# Altium PCB PtHeadMB.PcbDoc
Units mm, origin at the board's own origin, x right, y up, seen from the top; angles counter-clockwise.
Board outline 41.01 x 24 mm, 2 copper layers (Top Layer, Bottom Layer), stack 1.48 mm thick; 96 components, 65 nets, 288 pads, 455 vias.
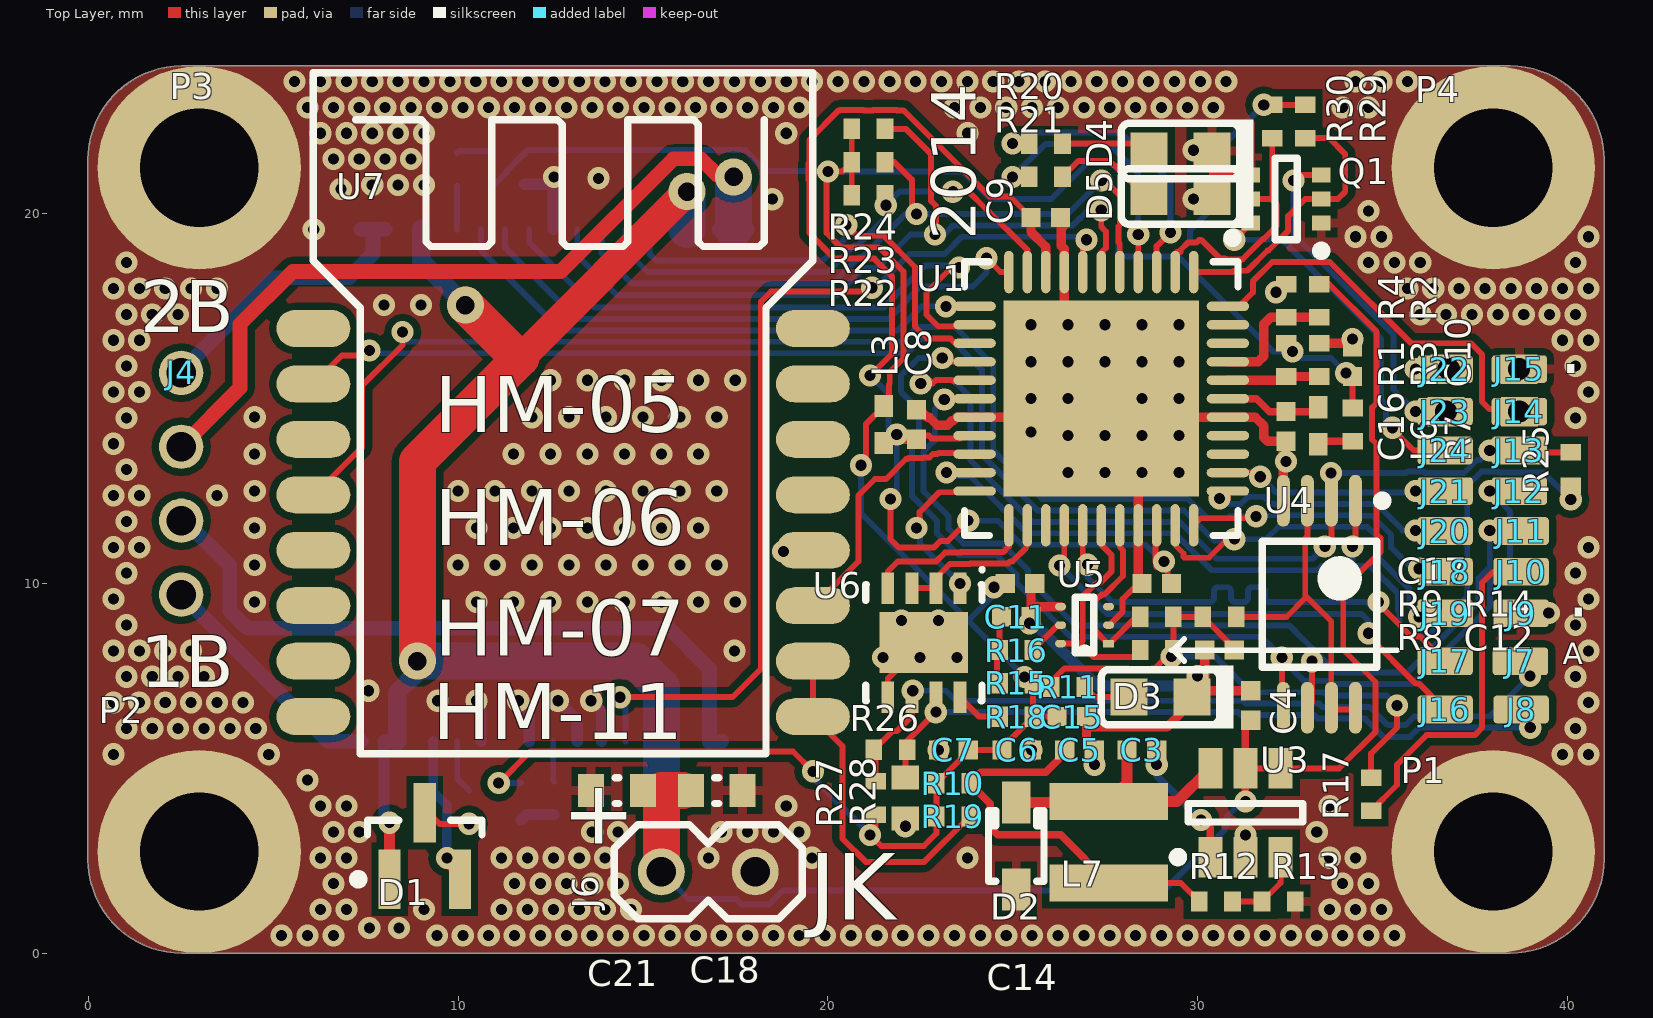
[diagram p0: Top Layer view]
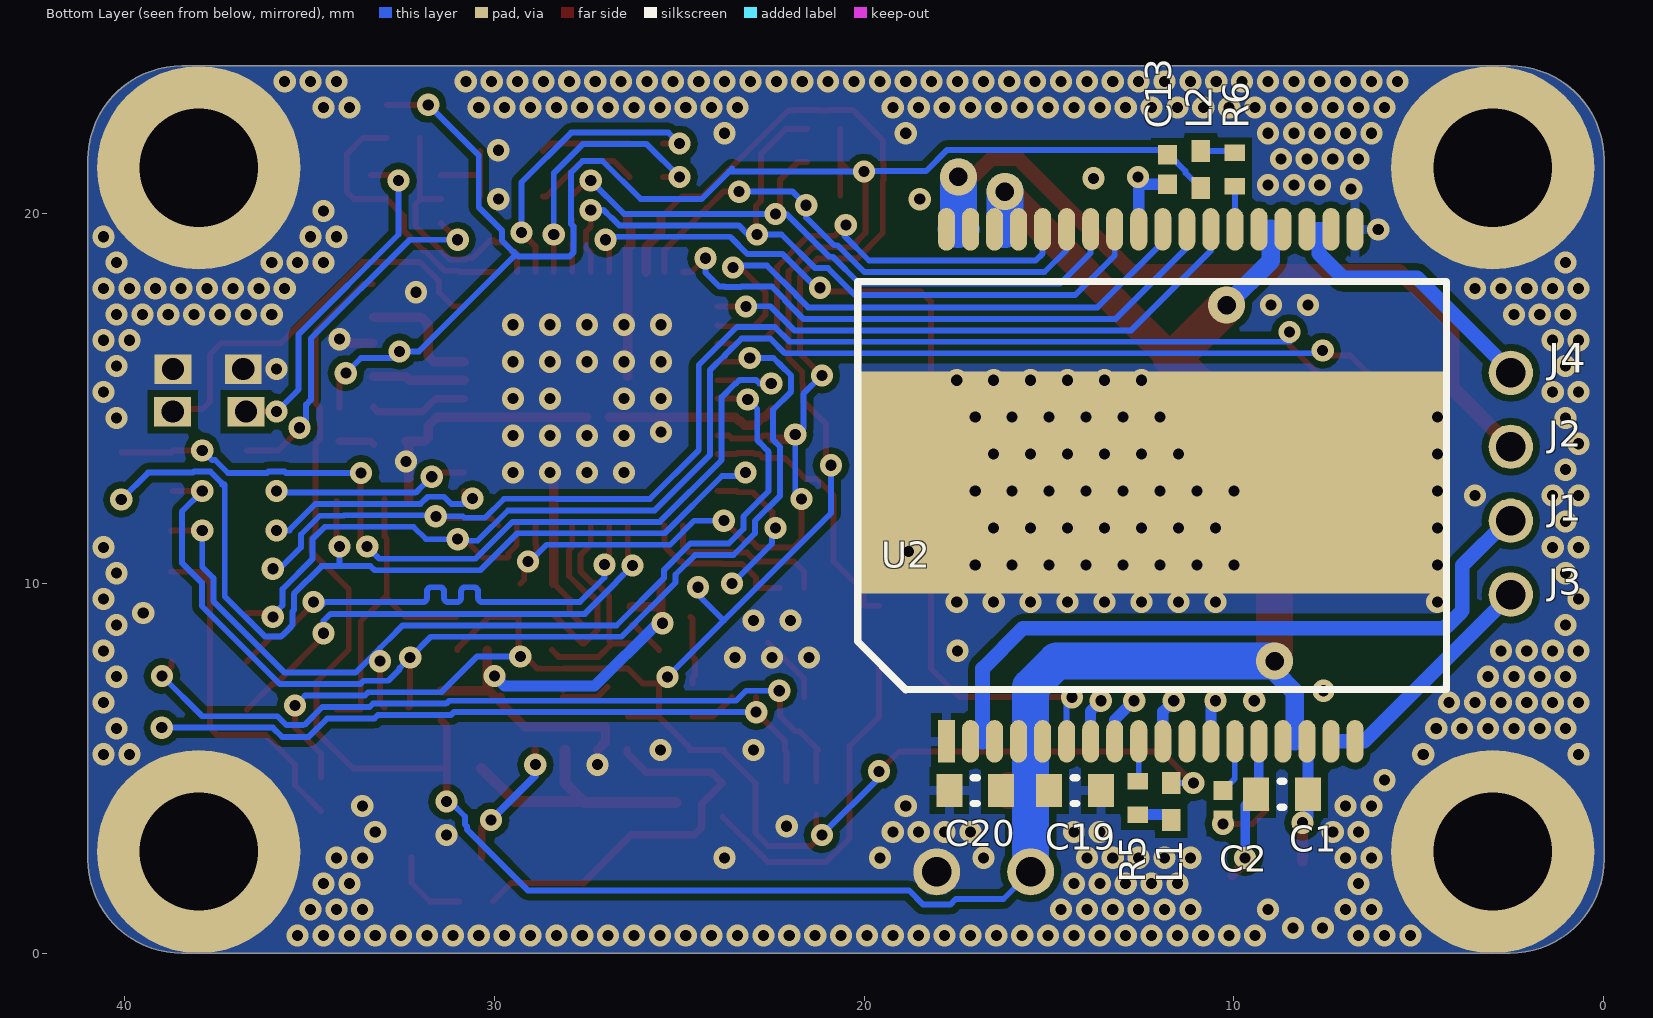
[diagram p1: Bottom Layer view, seen from below]

## Layer stack, top to bottom
Top Solder: solder mask 0.0102, Solder Resist, Dk 3.5
Top Layer: signal copper 0.0356
Dielectric 1: dielectric 1.4086, FR-4, Dk 4.8
Bottom Layer: signal copper 0.0356
Bottom Solder: solder mask 0.0102, Solder Resist, Dk 3.5

## Board outline
12,0 2.53,0 cw(c2.53,2.54) -0.01,2.54 -0.01,21.46 cw(c2.53,21.46) 2.53,24 38.46,24 cw(c38.46,21.46) 41,21.46 41,2.54 cw(c38.46,2.54) 38.46,0

## Design rules (kind name [scope] priority, off if disabled: settings)
AssemblyTestPointUsage [All] p1 off:
AssemblyTestpoint [All] p1 off: testpointundercomponent=TRUE minsize=1.016 maxsize=2.54 preferedsize=1.524 minholesize=0 maxholesize=1.016 preferedholesize=0.813 testpointgrid=0.025 usegrid=TRUE gridtolerance=0 allowsidetop=TRUE allowsidebottom=TRUE
Clearance Clearance_1 [InNamedPolygon('Top Layer-GND')] p1: gap=0.19
Clearance Clearance_2 [InNamedPolygon('Bot-GND')] p2: gap=0.18
Clearance VIN-all [InNet('VIN')] p3: gap=0.17
Clearance "Stitching GND" [IsStitchingVia and InNet('GND') vs (IsVia and (Not IsStitchingVia)) Or IsPad] p4: gap=0
Clearance [All] p5: gap=0.15
ComponentClearance [All] p1 off: gap=0.1 collisioncheckmode=3 verticalgap=2540 showdistances=FALSE
DiffPairsRouting [All] p1: maxlimit=0.254 minlimit=0.16 mostfreqgap=0.19 toplayer_minwidth=0.16 toplayer_maxwidth=0.381 toplayer_prefwidth=0.19 bottomlayer_minwidth=0.16 bottomlayer_maxwidth=0.381 bottomlayer_prefwidth=0.19 maxuncoupledlength=12.7
FabricationTestpoint [All] p1: side=3 testpointundercomponent=TRUE minsize=1.016 maxsize=2.54 preferedsize=0.6 minholesize=0 maxholesize=1.016 preferedholesize=0.3 testpointgrid=0.025 allowsidetop=TRUE allowsidebottom=TRUE usegrid=TRUE gridtolerance=0
HoleSize [All] p1: absolutevalues=TRUE maxlimit=5 minlimit=0.025 maxpercent=80.000 minpercent=20.000
MinimumAnnularRing [All] p1: minimumring=0.15
MinimumSolderMaskSliver [All] p1 off: minsoldermaskwidth=0.18
PlaneClearance [All] p1: clearance=0.25
PlaneConnect [All] p1: planeconnectstyle=Relief reliefexpansion=0.2 reliefentries=4 reliefconductorwidth=0.3 reliefairgap=0.2
PolygonConnect [HasPad('U2-37') or IsStitchingVia or IsVia vs IsPoly] p1: connectstyle=Direct reliefconductorwidth=0.22 reliefentries=4 polygonreliefangle="90 Angle" airgapwidth=0.16
PolygonConnect PolygonConnect_2 [AsMM(HoleDiameter)>0.2 vs IsPoly] p2: connectstyle=Direct reliefconductorwidth=0.254 reliefentries=4 polygonreliefangle="90 Angle" airgapwidth=0.254
PolygonConnect PolygonConnect_1 [All] p3: connectstyle=Relief reliefconductorwidth=0.254 reliefentries=4 polygonreliefangle="90 Angle" airgapwidth=0.18
RoutingVias [All] p1: holewidth=0.3 width=0.6 viastyle="Through Hole" minholewidth=0.3 minwidth=0.6 maxholewidth=0.5 maxwidth=1.27
SilkToSolderMaskClearance [IsPad] p1: minsilkscreentomaskgap=0.1 clearancetoexposedcopper=TRUE
SolderMaskExpansion SolderMaskExpansion_2 [IsVia] p1: expansion=-1
SolderMaskExpansion SolderMaskExpansion_1 [(AsMM(HoleDiameter)<0.6) and (AsMM(HoleDiameter)>0.1)] p2: expansion=0.1
SolderMaskExpansion [All] p3: expansion=0.1
Width [All] p1: maxlimit=2 minlimit=0.15 preferedwidth=0.16
20 further rules are at their usual default settings.

## Classes and differential pairs
component class U_peripherials: C11 C12 C13 C14 C15 J7 J8 J9 J10 J11 J12 J13 J14 J15 J23 J24 Q1 R14 R15 R16 R17 R18 R19 R25 R26 R27 R28 R29 R30 U4 U5 U6 U7
component class Designator: C1 C2 C3 C4 C5 C6 C7 C8 C9 C10 C16 C17 C18 C19 C20 C21 D1 D2 D3 D4 D5 J1 J2 J3 J4 J6 J16 J17 J18 J19 J20 J21 J22 L1 L2 L3 L6 L7 P1 P2 P3 P4 R1 R2 R3 R4 R5 R6 R7 R8 R9 R10 R11 R12 R13 R20 R21 R22 R23 R24 U1 U2 U3
differential pair D: +D_P -D_N

## Components (designator, comment, footprint, x,y, rotation, side; value= is the part's Value field where it differs from the comment)
C1 "CAP 220nF 50V 0603(1608)" CAPC0603(1608)100_L 8.7,4.3 r0 bottom
C2 "CAP 10nF 16V 0402(1005)" CAPC0402(1005)60_L 10.3,4 r270 bottom
C3 "CAP 100nF 16V 0402(1005)" CAPC0402(1005)60_L 28.5,5.5 r180 top
C4 "CAP 2.2pF 50V 0402(1005)" CAPC0402(1005)60_L 31.446,6.7 r270 top
C5 "CAP 10uF 6.3V 0402(1005)" CAPC0402(1005)60_L 26.81,5.5 r180 top
C6 "CAP 10uF 6.3V 0402(1005)" CAPC0402(1005)60_L 25.112,5.5 r180 top
C7 "CAP 10uF 6.3V 0402(1005)" CAPC0402(1005)60_L 23.4,5.5 r0 top
C8 "CAP 100nF 6.3V 0402(1005)" CAPC0402(1005)60_L 22.4,14.3 r90 top
C9 "CAP 100nF 6.3V 0402(1005)" CAPC0402(1005)60_L 25.9,19.9 r0 top
C10 "CAP 100nF 6.3V 0402(1005)" CAPC0402(1005)60_L 34.2,16 r90 top
C11 "CAP 100nF 6.3V 0402(1005)" CAPC0402(1005)60_L 25.1,9.1 r180 top
C12 "CAP 100nF 6.3V 0402(1005)" CAPC0402(1005)60_L 30.6,8.2 r180 top
C13 "CAP 100nF 6.3V 0402(1005)" CAPC0402(1005)60_L 11.8,21.2 r270 bottom
C14 "CAP 100nF 6.3V 0402(1005)" CAPC0402(1005)60_L 25.2,10 r0 top
C15 "CAP 100nF 6.3V 0402(1005)" CAPC0402(1005)60_L 26.6,6.4 r0 top
C16 "CAP 100nF 16V 0402(1005)" CAPC0402(1005)60_L 32.4,14.25 r270 top
C17 "CAP 100nF 6.3V 0402(1005)" CAPC0402(1005)60_L 28.9,10 r180 top
C18 "CAP 1uF 50V 0603(1608)" CAPC0603(1608)100_L 17,4.4 r180 top
C19 "CAP 1uF 50V 0603(1608)" CAPC0603(1608)100_L 14.3,4.4 r0 bottom
C20 "CAP 1uF 50V 0603(1608)" CAPC0603(1608)100_L 17,4.4 r180 bottom
C21 "CAP 1uF 50V 0603(1608)" CAPC0603(1608)100_L 14.3,4.4 r0 top
D1 "BAV99" MCHP-SOT-23-NB3_N 9.1,2.9 r90 top
D2 "ZHCS400" DIOD-SOD323-2_V 25.1,2.9 r90 top
D3 "KP-1608MGC" KING-0603LED_GREEN_V 29,6.925 r180 top
D4 "KP-1608MGC" KING-0603LED_GREEN_V 29.545,21.7 r180 top
D5 "KP-1608MGC" KING-0603LED_GREEN_V 29.545,20.47 r180 top
J1 "Pin" "Hole 1mm"#1 1.793,12.1 r180 bottom
J2 "Pin" "Hole 1mm"#2 2.512,14.4 r180 bottom
J3 "Pin" "Hole 1mm"#3 2.512,9.7 r180 bottom
J4 "Pin" "Hole 1mm"#4 2.512,16.1 r0 top
J6 "jumper" "header 2pin" 16.77,2.2 r180 top
J7 "smd pad" "pad 0.75x1.5mm" 38.737,7.894 r270 top
J8 "smd pad" "pad 0.75x1.5mm" 38.757,6.594 r270 top
J9 "smd pad" "pad 0.75x1.5mm" 38.757,9.194 r270 top
J10 "smd pad" "pad 0.75x1.5mm" 38.757,10.319 r90 top
J11 "smd pad" "pad 0.75x1.5mm" 38.757,11.419 r90 top
J12 "smd pad" "pad 0.75x1.5mm" 38.709,12.5 r90 top
J13 "smd pad" "pad 0.75x1.5mm" 38.709,13.6 r90 top
J14 "smd pad" "pad 0.75x1.5mm" 38.709,14.65 r90 top
J15 "smd pad" "pad 0.75x1.5mm" 38.709,15.8 r90 top
J16 "smd pad" "pad 0.75x1.5mm" 36.7,6.594 r90 top
J17 "smd pad" "pad 0.75x1.5mm" 36.7,7.894 r90 top
J18 "smd pad" "pad 0.75x1.5mm" 36.7,10.319 r90 top
J19 "smd pad" "pad 0.75x1.5mm" 36.7,9.194 r90 top
J20 "smd pad" "pad 0.75x1.5mm" 36.7,11.419 r90 top
J21 "smd pad" "pad 0.75x1.5mm" 36.7,12.5 r90 top
J22 "smd pad" "pad 0.75x1.5mm" 36.7,15.8 r90 top
J23 "smd pad" "pad 0.75x1.5mm" 36.7,14.65 r90 top
J24 "smd pad" "pad 0.75x1.5mm" 36.7,13.6 r90 top
L1 "742843122" 0402 11.7,4.1 r90 bottom
L2 "742843122" 0402 10.9,21.2 r270 bottom
L3 "742843122" 0402 21.519,14.3 r90 top
L6 "742843122" 0402 33.275,14.267 r270 top
L7 "744029150" WE-TPC-2813-TH 27.6,3 r270 top
P1 "screw" "M3 screw" 38,2.75 r0 top
P2 "screw" "M3 screw" 3,2.75 r0 top
P3 "screw" "M3 screw" 3,21.25 r0 top
P4 "screw" "M3 screw" 38,21.25 r0 top
Q1 "NTJD4001NT2G" ONSC-SOT-363-6-419B-02_W_V 32.4,20.4 r180 top
R1 "10K 1% 0402(1005)" RESC0402(1005)_L 32.4,16.05 r90 top
R2 "30K 1% 0402(1005)" RESC0402(1005)_L 33.3,17.65 r90 top
R3 "1K 1% 0402(1005)" RESC0402(1005)_L 33.3,16.05 r90 top
R4 "1K 1% 0402(1005)" RESC0402(1005)_L 32.4,17.65 r90 top
R5 "Jumper 0402(1005)" RESC0402(1005)_L 12.6,4.2 r270 bottom
R6 "Jumper 0402(1005)" RESC0402(1005)_L 9.976,21.2 r90 bottom
R7 "Jumper 0402(1005)" RESC0402(1005)_L 34.2,14.3 r90 top
R8 "4K7 1% 0402(1005)" RESC0402(1005)_L 28.9,8.2 r0 top
R9 "4K7 1% 0402(1005)" RESC0402(1005)_L 28.9,9.1 r180 top
R10 "Jumper 0402(1005)" RESC0402(1005)_L 23.39,4.6 r180 top
R11 "130R 5% 0402(1005)" RESC0402(1005)_L 26.5,7.2 r180 top
R12 "1K02 1% 0402(1005)" RESC0402(1005)_L 30.5,1.4 r180 top
R13 "3K4 1% 0402(1005)" RESC0402(1005)_L 32.2,1.4 r180 top
R14 "Jumper 0402(1005)" RESC0402(1005)_L 30.6,9.1 r180 top
R15 "Jumper 0402(1005)" RESC0402(1005)_L 25.1,7.3 r180 top
R16 "4K7 1% 0402(1005)" RESC0402(1005)_L 25.1,8.2 r180 top
R17 "Jumper 0402(1005)" RESC0402(1005)_L 34.7,4.3 r90 top
R18 "Jumper 0402(1005)" RESC0402(1005)_L 25.1,6.4 r180 top
R19 "Jumper 0402(1005)" RESC0402(1005)_L 23.39,3.7 r180 top
R20 "130R 5% 0402(1005)" RESC0402(1005)_L 25.9,21.9 r0 top
R21 "130R 5% 0402(1005)" RESC0402(1005)_L 25.9,21 r0 top
R22 "39K 5% 0402(1005)" RESC0402(1005)_L 21.1,20.5 r0 top
R23 "39K 5% 0402(1005)" RESC0402(1005)_L 21.1,21.4 r0 top
R24 "39K 5% 0402(1005)" RESC0402(1005)_L 21.1,22.3 r0 top
R25 "39K 5% 0402(1005)" RESC0402(1005)_L 40.1,13.1 r90 top
R26 "120R 5% 0402(1005)" RESC0402(1005)_L 21.7,5.5 r0 top
R27 "560R 5% 0402(1005)" RESC0402(1005)_L 21.3,4.2 r270 top
R28 "560R 5% 0402(1005)" RESC0402(1005)_M 22.1,4.2 r90 top
R29 "39K 5% 0402(1005)" RESC0402(1005)_L 32.918,22.5 r90 top
R30 "39K 5% 0402(1005)" RESC0402(1005)_L 32.026,22.5 r90 top
U1 "ATxmega128A4U-MH" "qfn 44pin" 27.4,15 r270 top locked
U2 "L6470" POWERSO36 20.176,7.131 r90 bottom
U3 "LM2840XQMK/NOPB" MK06A_N 31.3,3.8 r90 top
U4 "25AA256-I/ST" TSSOP-ST8_L 33.3,9.44 r270 top locked
U5 "TMP102" DRL6 27.6,8.375 r180 top
U6 "SN65HVD72DRBR" TI-DRB8-2400X1650TP_V 22.6,8.4 r270 top
U7 "www.jnhuamao.cn" HM_05_06_07_11 6.087,5.4 r0 top locked

## Footprints (in the part's own frame and the unit in brackets; to place one, negate y for a bottom-side part, rotate by r counter-clockwise, add the part's x,y. Pads: shape width x height; smd on the part's side, far side on the other; paste and mask are expansions set on the pad)
0402 [mm] "Chip Capacitor, Body 1.0x0.5mm, IPC High Density"
  rect 0.6x0.5 smd: 1(-0.5,0) 2(0.5,0)
  body extent -0.55,-0.3 0.55,0.3, height 1.3
CAPC0402(1005)60_L [mm] "Chip Capacitor, Body 1.0x0.5mm, Height 0.6mm, IPC High Density"
  rect 0.52x0.52 smd: 1(-0.4,0) 2(0.4,0)
  body extent -0.55,-0.3 0.55,0.3, height 0.6
CAPC0603(1608)100_L [mm] "Chip Capacitor, Body 1.6x0.8mm, Height 1.0mm, IPC High Density"
  rect 0.7x0.9 smd: 1(-0.7,0) 2(0.7,0)
  silkscreen extent -0.05,-0.35 0.05,0.35, body extent -0.87,-0.47 0.88,0.48, height 1
DIOD-SOD323-2_V [mil] "SMT Diode, 2 Leads, Body 1.7 x 1.3 mm"
  rect 45x30 smd: 1(-46.26,0) 2(46.26,0)
  silkscreen extent -37,-30 37,30, body extent -39,-27 38,28, height 43
DRL6 [mm]
  rect 0.3x0.2 smd: 1(0,0)
  oval 0.3x0.2 smd: 2(0,-0.5) 3(0,-1) 4(1.3,-1) 5(1.3,-0.5) 6(1.3,0)
  silkscreen extent 0.4,-1.25 0.9,0.25, body extent -0.03,-1.36 1.3,0.35, height 0.6
"header 2pin" [mm]
  round 1.27 hole 0.8: 1(-1.27,0) 2(1.27,0)
  silkscreen extent -2.54,-1.27 2.54,1.27
HM_05_06_07_11 [mm]
  oval 2x1 smd: 1(0,11.5) 2(0,10) 3(0,8.5) 4(0,7) 5(0,5.5) 6(0,4) 7(0,2.5) 8(0,1) 9(13.513,1) 10(13.513,2.5) 11(13.513,4) 12(13.513,5.5) 13(13.513,7) 14(13.513,8.5) 15(13.513,10) 16(13.513,11.5)
  silkscreen extent 0,0 13.51,18.41
"Hole 1mm"#1 [mm]
  round 1.2 hole 0.8: 1(-0.719,-0.4)
"Hole 1mm"#2 [mm]
  round 1.2 hole 0.8: 1(0,-0.7)
"Hole 1mm"#3 [mm]
  round 1.2 hole 0.8: 1(0,0)
"Hole 1mm"#4 [mm]
  round 1.2 hole 0.8: 1(0,-0.4)
KING-0603LED_GREEN_V [mm] "SMT LED, 2-Leads, Body 1.6x0.8mm (0603-Size)"
  rect 1x1 smd paste+0 mask+0: 1(0.85,0) 2(-0.85,0)
  silkscreen extent -1.97,-0.85 1.6,0.85, body extent -0.92,-0.53 1.09,0.53, height 1.1
"M3 screw" [mm]
  round 5.5 hole 3.2: 0(0,0)
  body extent -2.74,-2.73 2.74,2.75, height 3.01
MCHP-SOT-23-NB3_N [mm] "SOT23, 3-Leads, Body 2.86x1.28mm, Pitch 0.95mm, IPC Medium Density"
  rect 1.6x0.6 smd: 1(-0.9,0.95) 2(-0.9,-0.95) 3(0.9,0)
  silkscreen extent -1.02,-1.55 0.7,1.92, body extent -0.7,-1.52 0.7,1.53, height 1.12
MK06A_N [mm] "SOT23, 6-Leads, Body 3.0x1.7mm, Pitch 0.95mm, Lead Span 2.9mm, IPC Medium Density"
  rect 1.1x0.65 smd: 1(-1.2,0.95) 2(-1.2,0) 3(-1.2,-0.95) 4(1.2,-0.95) 5(1.2,0) 6(1.2,0.95)
  silkscreen extent -1.32,-1.55 0.25,1.95, body extent -0.87,-1.53 0.87,1.54, height 1
ONSC-SOT-363-6-419B-02_W_V [mm] "SOT23, 6-Leads, Body 2x1.25mm, Pitch 0.65mm"
  rect 0.5x0.4 smd: 1(-0.95,0.65) 2(-0.95,0) 3(-0.95,-0.65) 4(0.95,-0.65) 5(0.95,0) 6(0.95,0.65)
  silkscreen extent -1.08,-1.1 0.3,1.52, body extent -0.63,-1 0.63,1, height 1.1
"pad 0.75x1.5mm" [mm]
  rrect25% 0.75x1.5 smd: 0(0,0)
POWERSO36 [mm]
  rect 1.15x0.46 smd: 1(-1.4,-2.4)
  oval 1.15x0.46 smd: 2(-1.4,-3.7) 2(-1.4,-3.05) 4(-1.4,-4.35) 5(-1.4,-5) 6(-1.4,-5.65) 7(-1.4,-6.3) 8(-1.4,-6.95) 9(-1.4,-7.6) 10(-1.4,-8.25) 11(-1.4,-8.9) 12(-1.4,-9.55) 13(-1.4,-10.2) 14(-1.4,-10.85) 15(-1.4,-11.5) 16(-1.4,-12.15) 17(-1.4,-13.45) 17(-1.4,-12.8) 19(12.45,-13.45) 20(12.45,-12.8) 20(12.45,-12.15) 22(12.45,-11.5) 23(12.45,-10.85) 24(12.45,-10.2) 25(12.45,-9.55) 26(12.45,-8.9) 27(12.45,-8.25) 28(12.45,-7.6) 29(12.45,-6.95) 30(12.45,-6.3) 31(12.45,-5.65) 32(12.45,-5) 33(12.45,-4.35) 34(12.45,-3.7) 35(12.45,-3.05) 35(12.45,-2.4)
  rrect2% 6x16 smd: 37(5.6,-8)
  silkscreen extent 0,-15.93 11.04,0, body extent -0.1,-16.03 11.14,0, height 3.3
"qfn 44pin" [mm] "without thermal vias"
  oval 1.15x0.25 smd: 1(-3.425,2.5) 2(-3.425,2) 3(-3.425,1.5) 4(-3.425,1) 5(-3.425,0.5) 6(-3.425,0) 7(-3.425,-0.5) 8(-3.425,-1) 9(-3.425,-1.5) 10(-3.425,-2) 11(-3.425,-2.5) 23(3.425,-2.5) 24(3.425,-2) 25(3.425,-1.5) 26(3.425,-1) 27(3.425,-0.5) 28(3.425,0) 29(3.425,0.5) 30(3.425,1) 31(3.425,1.5) 32(3.425,2) 33(3.425,2.5)
  oval 0.25x1.15 smd: 12(-2.5,-3.425) 13(-2,-3.425) 14(-1.5,-3.425) 15(-1,-3.425) 16(-0.5,-3.425) 17(0,-3.425) 18(0.5,-3.425) 19(1,-3.425) 20(1.5,-3.425) 21(2,-3.425) 22(2.5,-3.425) 34(2.5,3.425) 35(2,3.425) 36(1.5,3.425) 37(1,3.425) 38(0.5,3.425) 39(0,3.425) 40(-0.5,3.425) 41(-1,3.425) 42(-1.5,3.425) 43(-2,3.425) 44(-2.5,3.425)
  rect 5.3x5.3 smd: 45(0,0)
  silkscreen extent -4.47,-3.7 3.7,3.7, body extent -3.55,-3.55 3.55,3.55, height 1
RESC0402(1005)_L [mm] "Chip Resistor, Body 1.0x0.5mm, IPC High Density"
  rect 0.45x0.55 smd: 1(-0.45,0) 2(0.45,0)
  body extent -0.52,-0.27 0.53,0.28, height 0.4
RESC0402(1005)_M [mm] "Chip Resistor, Body 1.0x0.5mm, IPC Low Density"
  rect 0.65x0.75 smd: 1(-0.55,0) 2(0.55,0)
  body extent -0.52,-0.28 0.53,0.28, height 0.4
TI-DRB8-2400X1650TP_V [mm] "SON, 8-Leads, Body 3x3mm, Pitch 0.65mm, Thermal Pad 2.4x1.65mm"
  rect 0.85x0.35 smd: 1(-1.475,0.975) 2(-1.475,0.325) 3(-1.475,-0.325) 4(-1.475,-0.975) 5(1.475,-0.975) 6(1.475,-0.325) 7(1.475,0.325) 8(1.475,0.975)
  rect 1.65x2.4 smd: 9(0,0)
  silkscreen extent -2.02,-1.58 1.57,1.62, body extent -1.5,-1.5 1.5,1.5, height 1
TSSOP-ST8_L [mm] "TSOP, 8-Leads, Body 3x4.4mm, Pitch 0.65mm, IPC High Density"
  oval 1.4x0.35 smd: 1(-2.8,0.975) 2(-2.8,0.325) 3(-2.8,-0.325) 4(-2.8,-0.975) 5(2.8,-0.975) 6(2.8,-0.325) 7(2.8,0.325) 8(2.8,0.975)
  silkscreen extent -2.92,-1.55 1.7,1.83, body extent -2.25,-1.55 2.25,1.55, height 1.2
WE-TPC-2813-TH [mm] "SMD Inductor, 2-Leads, Body 2.8 x 2.8 mm"
  rect 1x3.2 smd: 1(-1.1,0) 2(1.1,0)
  body extent -1.38,-1.39 1.4,1.39, height 1.15

## Part data
C1: library part CMP-1035-02654-1, "CAP 220nF 50V ±20% 0603 (1608 Metric) Thickness 1mm SMD"
C2: library part CMP-1034-01876-1, "CAP 10nF 16V ±10% 0402 (1005 Metric) Thickness 0.6mm SMD"
C3 C16: library part CMP-1034-02069-1, "CAP 100nF 16V ±10% 0402 (1005 Metric) Thickness 0.6mm SMD"
C4: library part CMP-1034-00178-1, "CAP 2.2pF 50V ±2% 0402 (1005 Metric) Thickness 0.6mm SMD"
C5 C6 C7: library part CMP-1034-02138-1, "CAP 10uF 6.3V ±20% 0402 (1005 Metric) Thickness 0.6mm SMD"
C8 C9 C10 C11 C12 C13 C14 C15 C17: library part CMP-1034-02060-1, "CAP 100nF 6.3V ±5% 0402 (1005 Metric) Thickness 0.6mm SMD"
C18 C19 C20 C21: library part CMP-1035-02745-1, "CAP 1uF 50V ±10% 0603 (1608 Metric) Thickness 1mm SMD"
D2: library part CMP-0303-00001-1, "Schottky Diode, 400mA"
D3 D4 D5: library part CMP-0404-00001-1, "LED, SMT, 0603(1608), 1.1mm thickness, Green"
J6: library part "header 2pin"
J7 J8 J9 J10 J11 J12 J13 J14 J15 J16 J17 J18 J19 J20 J21 J22 J23 J24: library part pad
L1 L2 L3 L6: library part CMP-0220-00130-1, "SMD EMI Suppression Ferrite Bead WE-CBF HF, Z = 220 Ohm"
L7: library part CMP-0227-00078-1, "SMD Shielded Tiny Power Inductor WE-TPC, L = 15.0 µH"
Q1: library part CMP-1058-00811-1, "Small Signal MOSFET 30 V, 250 mA, Dual N-Channel, 6-Pin SOT-363, Pb-Free, Tape and Reel"
R1: library part CMP-1011-00623-1, "10K 0.063W 1% 0402 (1005 Metric)  SMD"
R2: library part CMP-1011-00675-1, "30K 0.063W 1% 0402 (1005 Metric)  SMD"
R3 R4: library part CMP-1011-00510-1, "1K 0.063W 1% 0402 (1005 Metric)  SMD"
R5 R6 R7 R10 R14 R15 R17 R18 R19: library part CMP-1011-00001-1, "Jumper 0402 (1005 Metric)"
R8 R9 R16: library part CMP-1011-00586-1, "4K7 0.063W 1% 0402 (1005 Metric)  SMD"
R11 R20 R21: library part CMP-1011-00053-1, "130R 0.063W 5% 0402 (1005 Metric)  SMD"
R12: library part CMP-1011-00511-1, "1K02 0.063W 1% 0402 (1005 Metric)  SMD"
R13: library part CMP-1011-00569-1, "3K4 0.063W 1% 0402 (1005 Metric)  SMD"
R22 R23 R24 R25 R29 R30: library part CMP-1011-00112-1, "39K 0.063W 5% 0402 (1005 Metric)  SMD"
R26: library part CMP-1011-00052-1, "120R 0.063W 5% 0402 (1005 Metric)  SMD"
R27 R28: library part CMP-1011-00068-1, "560R 0.063W 5% 0402 (1005 Metric)  SMD"
U1: library part CMP-0094-00056-2, "8/16-bit AVR XMEGA A4U Microcontroller, 1.6-3.6V, 32MHz, 128K + 8KB Flash, 2K EEPROM, 8K SRAM, 44-pin VQFN, Industrial Grade (-40°C to 85°C)"
U3: library part CMP-0063-01534-1, "100 mA up to 42V Input Step-Down DC/DC Regulator, Automotive Grade 1, Thin 6-pin SOT23, Pb-Free, 1000 Reel"
U4: library part CMP-0165-00405-1, "256K SPI Bus Serial EEPROM, 8-Pin TSSOP, Industrial Temperature"
U5: "Low Power Digital Temperature Sensor  With SMBus™/Two-Wire Serial Interface in SOT563"
U6: library part CMP-0694-00017-1, "3.3 V Supply RS-485 with IEC ESD Protection, 0.25 Mbps, -40 to 125 degC, 8-Pin SON, RoHS, Tape and Reel"
U7: library part HM_05_06_07_11, "HM bluetooth module HM-05,HM-06,HM-07, HM-11"

## Free pads (board coordinates)
  rect 1x0.8 hole 0.6: 0(36.8,15.8) 1(38.7,15.8) 2(38.709,14.65) 3(36.729,14.65)

## Via types
v1: diameter 0.6, hole 0.3, Top Layer to Bottom Layer, tented both sides, 416 vias
v2: diameter 0.6, hole 0.3, Top Layer to Bottom Layer, 35 vias
v3: diameter 1, hole 0.5, Top Layer to Bottom Layer, 4 vias

## Nets (pads, with @x,y where several pads share a name; then routed paths per layer and width w, separated by ;. In a path a pad name is that pad's centre, name@x,y a point inside that pad or via, vN(x,y) a via of type N, cw(c..) or ccw(c..) an arc to the next point about the centre after c; other vN are vias at no path point)
3V3: C6.2 C7.2 C10.1 C12.1 C13.1 C14.1 C15.1 L1.2 L2.2 L3.2 R1.2 R7.2 R8.2 R9.1 R10.2 R11.2 R14.2 R15.1 R17.2 R18.1 R19.2 R22.1 R23.1 R24.1 R27.2 R29.2 R30.2 | length 93.7
  Top Layer w0.16: v2(11.1,4.6) 11.957,5.457 19.063,5.457 v1(19.6,4.92) ; R22.1 R23.1 ; R24.1 R23.1 ; v2@21.039,13.2 21.039,14.32 L3.2 21.653,14.934 21.653,15.385 21.678,15.41 21.678,15.721 22.052,16.095 22.052,18.436 21.391,19.097 20.353,19.097 19.97,19.48 19.97,21.101 v1(20.012,21.143) 20.393,21.143 R23.1 ; R27.2 21.3,3.352 v2(21.148,3.2) 21.448,2.9 22.601,2.9 22.94,3.238 R19.2 R10.2 22.945,4.6 23.8,5.455 C7.2 C6.2 24.712,5.545 25.55,6.383 R18.1 ; C15.1@26.4,6.4 R18.1 ; R8.2@29.243,8.093 28.855,7.705 28.78,7.705 28.77,7.695 28.13,7.695 28.12,7.705 26.405,7.705 26,7.3 R15.1 R18.1 ; R8.2@29.3,8.025 v2(29.305,8.03) 29.35,8.075 R8.2 R9.1 R14.2 ; R14.2@30.175,9.1 R14.2 ; C12.1 C12.1 31,8.25 R14.2 ; v2(31.795,22.95) R30.2 R29.2 ; R7.2 C10.1 ; R17.2 34.7,5.4 35.4,6.1 v2(35.4,6.7)
  Bottom Layer w0.16: L2.2 11.31,21.11 11.31,21.155 C13.1@11.755,21.6 ; v2(11.1,4.6) L1.2 ; C13.1 C13.1@11.755,21.6 ; v1(19.6,4.92) 19.6,4.748 v2(21.148,3.2) ; v1@20,21.155 18.331,21.155 17.756,21.73 11.885,21.73 C13.1@11.755,21.6 ; v1(20.012,21.143) 23.657,21.143 ; v2(20.9,13.2) 20.9,11.9 23.8,9 ; 23.575,21.225 24.4,20.4 26.05,20.4 27.08,21.43 27.52,21.43 27.619,21.43 27.93,21.119 27.93,20.85 27.93,20.41 27.93,19.725 27.87,19.665 27.87,18.951 27.97,18.85 29.358,18.85 29.478,18.97 29.493,18.97 29.803,19.28 29.803,19.554 30.117,19.867 30.12,19.867 30.43,20.178 30.43,21.585 v2(31.795,22.95) ; v2(24.5,9.9) 24.5,9.7 23.8,9 ; v2(25.325,7.475) 23.8,9 ; v2(29.305,8.03) 30.47,8.03 31.44,7.06 33.418,7.06 33.509,6.969 35.131,6.969 v2(35.4,6.7) ; 29.475,18.85 32.05,16.275 v2(32.575,16.275) ; v2@32.7,16.1 33.615,16.1 v2(34.025,15.69)
485A: J7.0 R26.1 R27.1 U6.6 | length 21.2
  Top Layer w0.16: R27.1 21.3,5.45 R26.1 21.755,6.005 21.868,6.005 22.275,6.412 U6.6 22.4,7.05 22.35,7.1 v2(22.3,7.1) ; J7.0 38.737,7.763 v2(39,7.5)
  Bottom Layer w0.16: v2(22.3,7.1) 23.2,7.1 23.47,6.83 31.232,6.83 31.312,6.75 33.29,6.75 33.38,6.659 34.659,6.659 35.138,6.18 35.17,6.18 35.18,6.17 35.632,6.17 35.872,6.41 37.91,6.41 v2(39,7.5)
485B: J8.0 R26.2 R28.2 U6.7 | length 19.1
  Top Layer w0.16: R28.2@22.1,4.65 22.1,5.45 R26.2 22.15,5.745 v1(22.925,6.52) U6.7
  Bottom Layer w0.16: v1(22.925,6.52) 31.104,6.52 31.184,6.44 33.161,6.44 33.252,6.349 34.531,6.349 35.028,5.852 35.752,5.852 36,6.1 v2(39.005,6.1)
ADC3V3/10: R1.1 R3.1 U1.40 | length 2.5
  Top Layer w0.254: U1.40 32.3,15.5 R1.1 R3.1@33.275,15.6
ADCVIN/30: R2.1 R4.1 U1.41 | length 3.5
  Top Layer w0.254: U1.41 31.644,16 31.8,16.156 31.8,17.02 31.98,17.2 R4.1 R2.1@33.275,17.2
BUSY/S\Y\N\C\: R24.2 U1.6 U2.29 | length 21.6
  Top Layer w0.16: R24.2 22.114,22.3 22.8,21.614 22.8,20.349 22.93,20.219 22.93,19.77 ; U1.6 27.4,18.95 27.53,19.08 27.53,19.519 27.4,19.649 27.4,20.05 27.45,20.1 v1(27.4,20.1)
  Bottom Layer w0.16: U2.29 13.226,18.874 14.294,17.806 20.256,17.806 20.98,18.53 21.33,18.53 22.24,19.44 v1(22.9,19.44) 23.15,19.44 23.4,19.69 26.628,19.69 26.829,19.891 26.836,19.891 26.839,19.888 27.05,20.1 v1(27.4,20.1)
D_N: J16.0 U1.26 | length 13.4
  Top Layer w0.16: v2(26.27,10.487) 26.4,10.617 U1.26 ; v2(34.629,8.655) 34.629,8.57 35.91,7.289 36.005,7.289 J16.0
  Bottom Layer w0.16: v2(26.27,10.487) 26.71,10.047 26.71,10.03 27.56,9.18 34.442,9.18 34.629,8.993 v2(34.629,8.655)
D_P: J17.0 U1.27 | length 13.4
  Top Layer w0.16: U1.27 26.9,10.64 v2(27.03,10.51) ; v2(34.9,9.5) 34.9,9.45 35.78,8.57 36.024,8.57 J17.0
  Bottom Layer w0.16: v2(27.03,10.51) 27.03,10.163 27.693,9.5 30.22,9.5 30.335,9.5 ccw(c30.335,9.615) 30.45,9.615 30.45,9.785 cw(c30.565,9.785) 30.565,9.9 30.795,9.9 cw(c30.795,9.785) 30.91,9.785 30.91,9.615 ccw(c31.025,9.615) 31.025,9.5 31.255,9.5 ccw(c31.255,9.615) 31.37,9.615 31.37,9.785 cw(c31.485,9.785) 31.485,9.9 31.715,9.9 cw(c31.715,9.785) 31.83,9.785 31.83,9.615 ccw(c31.945,9.615) 31.945,9.5 32.29,9.5 32.4,9.5 34.574,9.5 34.737,9.337 v2(34.9,9.5)
GND: C4.1 C5.1 C6.1 C7.1 C8.2 C9.2 C10.2 C11.1 C12.2 C13.2 C14.2 C15.2 C16.2 C17.2 C18.1 C19.1 C20.1 C21.1 D2.1 D3.2 D4.2 D5.2 J6.1 J9.0 J15.0 J22.0 P1.0 P2.0 P3.0 P4.0 pad.0 pad.1 Q1.1 Q1.4 R3.2 R4.2 R13.1 R28.1 U1.8 U1.18 U1.30 U1.38 U1.45 U2.1 U2.7 U2.8 U2.10 U2.12 U2.19 U2.28 U2.37 U3.2 U4.4 U5.2 U5.4 U6.5 U6.9 U7.12 | length 46.4
  Top Layer w0.16: U6.5 21.625,7.425 U6.9 ; U5.2 27.617,8.875 27.98,9.238 27.98,9.58 C17.2@28.4,10 ; D5.2 30.395,21.1 ; D4.2 30.395,21.1 ; Q1.4 30.445,21.05 30.395,21.1
  Top Layer w0.254: C8.2@22.494,14.7 22.694,14.5 22.745,14.5 22.961,14.284 23.24,14.284 23.358,14.402 23.391,14.402 23.489,14.5 U1.18 U1.45@26.9,14.5 ; C11.1 25.499,9.375 ; C14.2@25.499,10 25.499,9.375 ; U5.4 25.499,9.375 ; U1.45@26.4,15.6 U1.8 26.4,19.054 26.323,19.131 26.323,19.609 26.4,19.686 C9.2@26.4,19.9 ; C5.1 27,5.71 27,6.123 29.186,6.123 29.85,6.787 D3.2@29.85,6.8 ; U1.45@27.5,14.5 U1.38 31.567,14.5 31.8,14.267 31.8,13.95 31.9,13.85 C16.2 32.325,13.775 U4.4@32.325,12.29 ; C17.2@28.4,10 U1.30 U1.45@28.4,13 ; D3.2 D3.2@29.85,6.8 ; C12.2 30.2,7.15 D3.2@30.15,7.1 ; C4.1 31,7.1 D3.2@30.15,7.1 ; R3.2 34.1,16.5 C10.2 ; D3.2@29.85,6.8 D3.2@30.15,7.1
  Bottom Layer w0.3: v1(10.5,6.83) 10.626,6.704 U2.12 ; v1(11.629,6.83) 11.926,6.533 U2.10 ; C13.2 v1@12.4,20.8 ; U2.28 12.576,20.976 v1(12.6,21) ; v1(12.7,6.83) 13.226,6.304 U2.8 ; v1(13.602,6.83) 13.876,6.556 U2.7 ; v1(25.456,8.925) 25.598,8.925 27.295,7.228 29.728,7.228 v1(30,7.5)
  other v1: 5.229,0.48 5.929,0.48 6.629,0.48 9.429,0.48 10.129,0.48 10.829,0.48 11.529,0.48 12.229,0.48 12.929,0.48 13.629,0.48 14.329,0.48 15.029,0.48 15.729,0.48 16.429,0.48 17.129,0.48 17.829,0.48 18.529,0.48 19.229,0.48 19.929,0.48 20.629,0.48 21.329,0.48 22.029,0.48 22.729,0.48 23.429,0.48 24.129,0.48 24.829,0.48 25.529,0.48 26.229,0.48 26.929,0.48 27.629,0.48 28.329,0.48 29.029,0.48 29.729,0.48 30.429,0.48 31.129,0.48 31.829,0.48 32.529,0.48 33.229,0.48 33.929,0.48 34.629,0.48 35.329,0.48 7.6,0.68 8.4,0.68 6.279,1.18 6.979,1.18 9.079,1.18 11.179,1.18 11.879,1.18 12.579,1.18 13.279,1.18 13.979,1.18 14.679,1.18 33.579,1.18 34.279,1.18 34.979,1.18 6.629,1.88 11.529,1.88 12.229,1.88 12.929,1.88 13.629,1.88 14.329,1.88 33.929,1.88 34.629,1.88 6.279,2.58 6.979,2.58 11.179,2.58 11.879,2.58 12.579,2.58 13.279,2.58 13.979,2.58 16.779,2.58 19.579,2.58 23.779,2.58 33.579,2.58 34.279,2.58 31.3,3.2 6.629,3.28 7.329,3.28 13.629,3.28 14.329,3.28 17.129,3.28 17.829,3.28 18.529,3.28 19.229,3.28 33.229,3.28 22.1,3.435 6.279,3.98 6.979,3.98 18.879,3.98 33.579,3.98 5.929,4.68 27.22,5.1 0.679,5.38 4.879,5.38 39.879,5.38 40.579,5.38 23,5.5 25.512,5.5 1.029,6.08 1.729,6.08 2.429,6.08 3.129,6.08 3.829,6.08 4.529,6.08 40.229,6.08 0.679,6.78 1.379,6.78 2.079,6.78 2.779,6.78 3.479,6.78 4.179,6.78 40.579,6.78 9.453,6.83 7.576,7.1 1.029,7.48 1.729,7.48 2.429,7.48 3.129,7.48 40.229,7.48 21.5,8 22.5,8 23.5,8 0.679,8.18 1.379,8.18 2.079,8.18 2.779,8.18 17.479,8.18 40.579,8.18 1.029,8.88 40.229,8.88 22,9 23,9 39.504,9.2 4.5,9.5 10.5,9.5 11.5,9.5 12.5,9.5 13.5,9.5 14.5,9.5 15.5,9.5 16.5,9.5 17.5,9.5 0.679,9.58 40.579,9.58 1.029,10.28 40.229,10.28 4.5,10.5 10,10.5 11,10.5 12,10.5 13,10.5 14,10.5 15,10.5 16,10.5 17,10.5 18.8,10.87 0.679,10.98 1.379,10.98 40.579,10.98 4.5,11.5 10.5,11.5 11.5,11.5 12.5,11.5 13.5,11.5 14.5,11.5 15.5,11.5 16.5,11.5 1.029,11.68 0.679,12.38 1.379,12.38 3.479,12.38 4.5,12.5 10,12.5 11,12.5 12,12.5 13,12.5 14,12.5 15,12.5 16,12.5 17,12.5 26.5,13 27.5,13 28.5,13 29.5,13 1.029,13.08 32.4,13.3 4.5,13.5 11.5,13.5 12.5,13.5 13.5,13.5 14.5,13.5 15.5,13.5 16.5,13.5 0.679,13.78 26.5,14 27.5,14 28.5,14 29.5,14 25.5,14.1 1.029,14.48 40.229,14.48 4.5,14.5 12,14.5 13,14.5 14,14.5 15,14.5 16,14.5 17,14.5 25.5,15 26.5,15 28.5,15 29.5,15 0.679,15.18 1.379,15.18 40.579,15.18 12.5,15.5 13.5,15.5 14.5,15.5 15.5,15.5 16.5,15.5 17.5,15.5 35.9,15.8 1.029,15.88 40.229,15.88 25.5,16 26.5,16 27.5,16 28.5,16 29.5,16 0.679,16.58 1.379,16.58 39.879,16.58 40.579,16.58 34.2,16.61 25.5,17 26.5,17 27.5,17 28.5,17 29.5,17 1.029,17.28 1.729,17.28 2.429,17.28 36.029,17.28 36.729,17.28 37.429,17.28 38.129,17.28 38.829,17.28 39.529,17.28 40.229,17.28 8,17.531 9,17.531 32.129,17.88 0.679,17.98 1.379,17.98 2.079,17.98 2.779,17.98 3.479,17.98 35.679,17.98 36.379,17.98 37.079,17.98 37.779,17.98 38.479,17.98 39.179,17.98 39.879,17.98 40.579,17.98 1.029,18.68 34.629,18.68 35.329,18.68 36.029,18.68 40.229,18.68 34.279,19.38 34.979,19.38 40.579,19.38 6.098,19.576 34.629,20.08 18.5,20.397 29.9,20.397 6.829,20.672 7.679,20.78 8.379,20.78 9.079,20.78 13.8,20.962 6.629,21.48 7.329,21.48 8.029,21.48 8.729,21.48 29.9,21.72 6.279,22.18 6.979,22.18 7.679,22.18 8.379,22.18 9.079,22.18 18.879,22.18 23.779,22.18 5.929,22.88 6.629,22.88 7.329,22.88 8.029,22.88 8.729,22.88 9.429,22.88 10.129,22.88 10.829,22.88 11.529,22.88 12.229,22.88 12.929,22.88 13.629,22.88 14.329,22.88 15.029,22.88 15.729,22.88 16.429,22.88 17.129,22.88 17.829,22.88 18.529,22.88 19.229,22.88 23.429,22.88 24.129,22.88 24.829,22.88 25.529,22.88 26.229,22.88 26.929,22.88 27.629,22.88 28.329,22.88 29.029,22.88 29.729,22.88 30.429,22.88 33.929,22.88 34.629,22.88 5.579,23.58 6.279,23.58 6.979,23.58 7.679,23.58 8.379,23.58 9.079,23.58 9.779,23.58 10.479,23.58 11.179,23.58 11.879,23.58 12.579,23.58 13.279,23.58 13.979,23.58 14.679,23.58 15.379,23.58 16.079,23.58 16.779,23.58 17.479,23.58 18.179,23.58 18.879,23.58 19.579,23.58 20.279,23.58 20.979,23.58 21.679,23.58 22.379,23.58 23.079,23.58 23.779,23.58 24.479,23.58 25.179,23.58 25.879,23.58 26.579,23.58 27.279,23.58 27.979,23.58 28.679,23.58 29.379,23.58 30.079,23.58 30.779,23.58 34.279,23.58 34.979,23.58 35.679,23.58
LCS: R23.2 U1.5 U2.30 | length 20.5
  Top Layer w0.16: R23.2 21.8,21.4 22.275,20.925 v1@22.275,20 ; v1(27.4,20.9) 27.4,20.8 27.3,20.9 27.5,20.9 27.93,20.47 27.93,19.88 27.9,19.85 27.9,19.695 27.87,19.665 27.87,19.226 27.9,19.196 U1.5
  Bottom Layer w0.16: U2.30 13.876,18.941 14.701,18.116 20.128,18.116 20.852,18.84 20.95,18.84 v1@22.11,20 ; v1(22.4,20) 23.5,20 26.5,20 v1(27.4,20.9) 27.4,20.8 v1@27.35,20.85
LFLAG: R22.2 U1.10 U2.31 | length 14
  Top Layer w0.16: v1(23.385,20.6) 23.814,20.6 24.254,20.16 24.265,20.16 25.4,19.025 U1.10
  Bottom Layer w0.16: U2.31 14.526,19.024 15.124,18.426 20,18.426 20.724,19.15 20.822,19.15 21.572,19.9 v1(21.572,20.233) 21.939,20.6 v1(23.385,20.6)
LSTCK: U1.14 U2.32 | length 12.4
  Top Layer w0.16: v1@20.576,19.627 20.796,19.407 21.519,19.407 22.362,18.564 22.362,17.362 22.362,16.954 22.686,16.63 23.319,16.63 23.479,16.47 23.645,16.47 23.675,16.5 U1.14
  Bottom Layer w0.16: U2.32 15.176,18.924 15.364,18.736 19.871,18.736 20.542,19.407 20.542,19.627 20.5,19.669 v1(20.5,19.7)
M\C\S\: J14.0 pad.2 U1.44 | length 11
  Top Layer w0.16: U1.44 31.125,17.5 31.5,17.875 31.5,18.174 32.026,18.7 33.582,18.7 35.782,16.5 37.4,16.5 37.7,16.2 37.7,14.919 37.9,14.719 J14.0@38.757,14.719
MISO: J13.0 R25.2 U1.16 U4.2 | length 24.3
  Top Layer w0.16: v1(22.516,15.41) 22.606,15.5 22.75,15.5 22.837,15.414 22.932,15.509 23.371,15.509 23.415,15.465 23.45,15.5 U1.16 ; v1(33.615,12.99) 33.615,12.835 33.625,12.825 U4.2 v1@33.625,11.155 ; v1(37.91,13.6) J13.0 38.759,13.55 R25.2
  Bottom Layer w0.16: v1(22.516,15.41) 22.833,15.41 22.932,15.509 23.371,15.509 23.47,15.41 23.49,15.41 23.859,15.041 23.859,13.341 25.53,11.67 29.516,11.67 30.516,10.67 33.118,10.67 v1(33.448,11) ; v1(33.615,12.99) 35.64,12.99 35.68,13.03 36.12,13.03 36.16,12.99 37.212,12.99 37.562,13.34 37.65,13.34 v1(37.91,13.6)
MISO: U1.12 U2.25 | length 15.1
  Top Layer w0.16: v2(23.202,17.49) 23.965,17.49 U1.12
  Bottom Layer w0.16: U2.25 10.626,19.004 12.78,16.85 21.892,16.85 22.542,17.5 23.212,17.5 v2(23.202,17.49)
MOSI: J12.0 U1.15 U4.5 | length 30.9
  Top Layer w0.16: v1@23.1,15.9 v1(23.1,16.1) 23.2,16 U1.15 ; v1(32.284,8) 32.284,6.681 U4.5 ; v1(37.91,12.5) J12.0
  Bottom Layer w0.15: 25.779,9.351 26.57,8.56 28.583,8.56
  Bottom Layer w0.16: v1@23.1,15.9 v1(23.1,16.1) 22.457,16.1 22.277,15.92 22.27,15.92 21.98,15.63 21.98,15.19 22.469,14.701 22.469,13.891 22.403,13.826 22.403,13.818 22.277,13.691 22.277,12.373 22.96,11.69 22.96,11.352 23.539,10.773 24.576,10.773 25.105,10.244 25.105,10.025 25.779,9.351 ; 28.583,8.56 31.724,8.56 v1(32.284,8) 32.57,7.714 32.57,7.68 32.88,7.37 33.547,7.37 33.637,7.279 35.806,7.279 37.92,9.394 37.92,10.02 38.46,10.56 38.46,11.95 v1(37.91,12.5)
MOSI: U1.13 U2.27 | length 16.4
  Top Layer w0.16: v1(23.55,18.55) 23.35,18.55 22.672,17.872 22.672,17.271 22.983,16.96 23.935,16.96 U1.13
  Bottom Layer w0.16: U2.27 11.926,19.235 13.691,17.47 21.519,17.47 21.83,17.78 21.83,17.8 22.63,18.6 23.5,18.6 v1(23.55,18.55)
NetC1_2: C1.2 D1.2 U2.14 | length 4.1
  Top Layer w0.254: v2@9.7,2.7 9.7,2.45 D1.2@10.05,2.1
  Bottom Layer w0.254: U2.14@9.319,5.724 U2.14 9.326,4.374 C1.2 9.7,4 v2(9.7,2.575)
NetC2_1: C2.1 U2.13 | length 1.5
  Bottom Layer w0.16: U2.13 9.98,5.727 9.98,4.72 C2.1
NetC2_2: C2.2 D1.3 | length 1.4
  Top Layer w0.16: D1.3@9.1,3.9 9.5,3.5 v2(10.3,3.5)
NetC3_1: C3.1 U3.1 | length 3.5
  Top Layer w0.2: v2(28.9,5.1) C3.1 ; v2(30.1,3.6) 30.15,3.6 30.35,3.4 U3.1
  Bottom Layer w0.2: v2(28.9,5.1) 28.9,4.8 v2(30.1,3.6)
NetC3_2: C3.2 D2.2 L7.1 U3.6 | length 7.2
  Top Layer w0.3: D2.2 27.575,4.075 L7.1 ; C3.2 28.1,4.6 L7.1 ; U3.6 29.45,4.1 L7.1
NetC5_2: C5.2 L7.2 R10.1 R12.2 | length 10.9
  Top Layer w0.16: L7.2 29.55,1.9 R12.2
  Top Layer w0.2: C5.2 26.41,5.41 25.9,4.9 24.14,4.9 R10.1 24.4,4.04 24.4,3.4 24.6,3.2 26.3,3.2 L7.2
NetC11_2: C11.2 R15.2 R16.2 | length 1.9
  Top Layer w0.16: R15.2 24.65,7.45 24.582,7.518 24.582,7.957 24.65,8.025 R16.2 24.65,9.05 C11.2
NetD3_1: D3.1 R11.1 | length 1.7
  Top Layer w0.16: R11.1 27.225,6.925 D3.1 ; D3.1@27.812,7.29 27.96,7.29 D3.1@28.15,7.1
NetD4_1: D4.1 R20.2 | length 2.4
  Top Layer w0.16: R20.2 28.495,21.9 D4.1
NetD5_1: D5.1 R21.2 | length 2.9
  Top Layer w0.16: R21.2 26.78,21.43 27.619,21.43 27.725,21.325 27.745,21.325 28.6,20.47 D5.1
NetJ10_0: J10.0 R17.1 | length 9.4
  Top Layer w0.16: R17.1 35.4,4.55 35.4,5.1 36.2,5.9 37.5,5.9 37.7,6.1 37.7,10.019 38,10.319 J10.0
NetJ23_0: J23.0 pad.3 Q1.3 | length 9.2
  Top Layer w0.16: v1(32.6,20.9) 32.75,21.05 Q1.3 ; v1(35.9,14.65) J23.0
  Bottom Layer w0.16: v1(32.6,20.9) 32.6,19.44 35.3,16.74 35.3,15.25 v1(35.9,14.65)
NetJ24_0: J24.0 Q1.6 | length 10
  Top Layer w0.16: v1(31,19.3) Q1.6 ; v2(35.275,14.214) 35.275,14.181 35.856,13.6 J24.0
  Bottom Layer w0.16: v1(31,19.3) 32.3,19.3 34.97,16.63 34.97,14.97 35.1,14.84 35.1,14.389 v2(35.275,14.214)
NetL1_1: L1.1 R5.2 | length 1
  Bottom Layer w0.3: L1.1 11.85,3.75 R5.2
NetL2_1: L2.1 R6.2 | length 0.9
  Bottom Layer w0.16: R6.2 10.026,21.7 L2.1
NetL6_2: L6.2 R7.1 | length 1
  Top Layer w0.2: L6.2 33.358,13.85 R7.1
NetQ1_2: Q1.2 R29.1 U1.1 | length 7.5
  Top Layer w0.16: U1.1 30.943,18.425 30.978,18.46 31.348,18.46 31.898,19.01 31.924,19.01 32.455,19.541 32.455,19.937 32.918,20.4 Q1.2 33.8,20.4 34,20.6 34,21.614 33.564,22.05 R29.1
NetQ1_5: Q1.5 R30.1 U1.2 | length 7
  Top Layer w0.16: U1.2 29.4,18.92 29.45,18.97 29.545,18.97 29.545,19.022 29.753,19.23 29.98,19.23 30.05,19.3 30.104,19.3 30.604,18.8 30.75,18.8 30.78,18.77 31.22,18.77 31.77,19.32 31.795,19.32 32.145,19.67 32.145,20.255 32,20.4 ; Q1.5 32,20.4 ; R30.1 32.026,20.426 32,20.4
NetR5_1: R5.1 U2.9 | length 1.1
  Bottom Layer w0.16: U2.9 12.576,4.674 R5.1
NetR6_1: R6.1 U2.24 | length 1.2
  Bottom Layer w0.16: U2.24 R6.1
NetR12_1: R12.1 R13.2 U3.3 | length 2.2
  Top Layer w0.16: R12.1 R13.2 32.25,1.9 U3.3
NetR14_1: R14.1 U4.3 U4.7 U4.8 | length 8.9
  Top Layer w0.15: 32.413,9.1 32.918,9.605 32.918,9.674 ; 32.918,10.057 32.918,9.674 ; U4.7 33.625,8.967 32.918,9.674
  Top Layer w0.16: R14.1 32.413,9.1 ; 32.918,10.057 32.918,11.22 32.975,11.277 U4.3 U4.3@32.975,12.29 ; U4.7 U4.7@33.625,6.59 ; U4.7@33.63,6.64 33.63,6.595 U4.7@33.625,6.59 ; U4.8 34.275,6.59 U4.7@33.625,6.59
NetR16_1: R16.1 U5.5 | length 1
  Top Layer w0.16: R16.1 26.225,8.875 U5.5
NetR18_2: R18.2 U6.8 | length 1.3
  Top Layer w0.16: U6.8 24.1,6.4 R18.2
NetR19_1: R19.1 U7.9 U7.10 | length 9.3
  Top Layer w0.16: U7.10 U7.9 20.4,5.6 20.4,3.1 21.03,2.47 22.61,2.47 R19.1
NetR20_1: R20.1 U1.3 | length 8
  Top Layer w0.16: v1(25,21.9) R20.1 ; U1.3 28.9,19.127 v1(29.273,19.5)
  Bottom Layer w0.16: v1(25,21.9) 25.297,22.197 27.93,22.197 29.273,20.854 v1(29.273,19.5)
NetR21_1: R21.1 U1.4 | length 7.2
  Top Layer w0.16: v1(25,21) R21.1 ; U1.4 v1(28.4,19.446)
  Bottom Layer w0.16: v1(25,21) 25.887,21.887 27.613,21.887 28.4,21.1 v1(28.4,19.446)
NetR25_1: R25.1 U1.21 U4.1 | length 25
  Top Layer w0.16: v2@34.275,11 U4.1
  Bottom Layer w0.16: v1(23.212,13) 23.388,13 23.478,12.91 23.852,12.91 25.402,11.36 29.387,11.36 30.387,10.36 31.348,10.36 32.928,10.36 33.246,10.36 33.356,10.47 33.667,10.47 34.2,10.47 ; v2(34.2,11) 34.2,10.47 ; v1(40.1,12.271) 39.371,13 38.159,13 38.129,13.03 37.69,13.03 37.38,12.72 37.38,12.68 37.3,12.68 37.3,9.651 36.219,8.57 35.78,8.57 35.75,8.6 35.73,8.6 35.527,8.803 35.537,8.813 35.47,8.88 35.47,9.241 35.43,9.281 35.43,9.72 34.68,10.47 34.2,10.47
NetU1_20: U1.20 U7.11 | length 7.4
  Top Layer w0.16: U7.11 20.018,9.4 20.018,9.786 20.83,10.598 20.83,12.38 21.28,12.83 21.58,12.83 22.12,13.37 22.158,13.37 22.188,13.4 22.594,13.4 22.604,13.41 22.755,13.41 22.845,13.5 22.962,13.5 22.992,13.53 23.431,13.53 23.461,13.5 U1.20
NetU1_22: U1.22 U6.1 | length 5.5
  Top Layer w0.16: v2@22.4,11.4 v2@22.3,11.5 ; v2(22.4,11.5) v2@22.3,11.5 ; U6.1 v1(23.575,10) ; U1.22 23.461,12.5 23.431,12.47 23.021,12.47 22.487,11.937 22.487,11.771 22.417,11.7 22.4,11.7 22.2,11.5 v2@22.3,11.5
  Bottom Layer w0.16: v2@22.33,11.47 v2@22.4,11.4 ; v2(22.4,11.5) 22.2,11.5 22.4,11.7 22.446,11.7 22.492,11.655 22.492,11.083 v1(23.575,10)
NetU1_23: U1.23 U6.4 | length 4.6
  Top Layer w0.16: U6.4 21.625,10.325 21.9,10.6 22.936,10.6 23.176,10.84 23.598,10.84 23.598,10.85 24.75,10.85 24.9,11 U1.23
NetU1_24: U1.24 U6.2 U6.3 | length 4.3
  Top Layer w0.16: U6.3 U6.2 22.925,10.15 23.305,10.53 23.845,10.53 23.855,10.54 24.878,10.54 24.938,10.6 25,10.6 25.37,10.97 25.37,11.02 25.4,11.05 U1.24
OUT1A: J1.1 U2.2 | length 19
  Bottom Layer w0.4: J1.1 2.613,11.7 3.826,10.487 3.826,9.274 3.85,9.25 3.85,9.231 4.231,8.85 4.25,8.85 4.31,8.79 15.71,8.79 16.8,7.7 16.8,5.705 16.826,5.731 U2.2@17.126,5.731
OUT1B: J3.1 U2.17 | length 6.5
  Bottom Layer w0.4: J3.1 6.481,5.731 6.726,5.731 U2.17@7.376,5.731
OUT2A: J2.1 U2.35 | length 21.5
  Top Layer w0.4: J2.1 4.1,15.288 4.1,17.013 5.527,18.44 12.781,18.44 15.831,21.49 16.569,21.49 17.006,21.053 17.401,21.053 v3(17.454,21)
  Bottom Layer w0.5: U2.35@17.126,19.581 17.454,19.581 U2.35@17.776,19.581
  Bottom Layer w1: 17.454,19.576 17.454,19.581 v3(17.454,21)
OUT2B: J4.1 U2.20 | length 7.9
  Bottom Layer w0.4: J4.1 2.512,15.743 5.042,18.274 7.05,18.274 7.7,18.924 7.7,19.581 ; U2.20@7.376,19.581 7.7,19.581 ; U2.20@8.026,19.581 8.007,19.6 7.988,19.581 7.7,19.581
PDI_CLOCK: J21.0 U1.35 | length 5.3
  Top Layer w0.16: U1.35 31.588,13 v2(31.7,12.888)
  Bottom Layer w0.16: v2(31.7,12.888) 31.93,12.658 31.939,12.658 32.137,12.46 35.86,12.46 v1(35.9,12.5)
PDI_DATA: J20.0 U1.34 | length 6.2
  Top Layer w0.16: v2@30.7,12.168 30.825,12.293 U1.34
  Bottom Layer w0.16: v2(30.6,12.3) 30.75,12.15 31.173,12.15 31.371,12.348 31.81,12.348 32.008,12.15 33.963,12.15 34.852,12.15 35.55,11.452 35.55,11.438 v1(35.9,11.438)
RX: J19.0 U1.32 U7.2 | length 39.3
  Top Layer w0.15: U1.32 29.4,11.042 29.625,10.817 29.625,10.725 29.65,10.7 30.319,10.7 30.819,11.2 v2(31,11.2)
  Top Layer w0.16: U7.2 6.857,16.17 7.47,16.17 v2(7.6,16.3) ; v1(36,9.1) 35.9,9.2 36.694,9.2 J19.0
  Bottom Layer w0.15: 28.22,11.98 28.225,11.975 29.642,11.975 30.459,11.158 v2@31,11.158 ; v2(31,11.2) 31.86,11.2 32.19,11.53 34.595,11.53
  Bottom Layer w0.16: v2(7.6,16.3) 7.67,16.23 22.148,16.23 22.548,16.63 23.319,16.63 23.773,16.177 23.773,16.16 23.781,16.168 24.169,15.781 24.169,13.479 25.668,11.98 28.22,11.98 ; 34.595,11.53 34.93,11.195 34.93,10.658 35.74,9.848 35.74,9.41 35.9,9.25 35.9,9.2 v1(36,9.1)
SCK: J11.0 U1.17 U4.6 | length 26.4
  Top Layer w0.16: v1@23.152,14.94 v1@23.152,14.971 ; v1(23.152,14.979) v1@23.152,14.971 ; U1.17 23.181,15 v1@23.152,14.971 ; U4.6 33.1,6.765 v2(33.1,7.9) ; v1(37.91,11.438) 38.738,11.438 J11.0
  Bottom Layer w0.15: 32.675,8.68 33.1,8.255
  Bottom Layer w0.16: v1(23.152,14.979) 22.895,14.722 22.895,13.879 22.713,13.697 22.713,13.69 22.587,13.563 22.587,12.501 23.27,11.818 23.27,11.48 23.667,11.083 24.705,11.083 25.415,10.373 25.415,10.153 26.703,8.865 28.45,8.865 28.455,8.87 32.485,8.87 32.675,8.68 ; v2@33.1,7.787 v2(33.1,7.9) 33.1,7.965 v2@33.245,8.11 ; 33.1,8.255 33.766,7.589 35.677,7.589 37.61,9.522 37.61,10.148 37.91,10.448 v1(37.91,11.438)
SCK: U1.11 U2.26 | length 16
  Top Layer w0.16: v1(24.3,18.8) 24.675,18.425 U1.11
  Bottom Layer w0.16: U2.26 11.276,19.081 13.197,17.16 21.648,17.16 22.14,17.652 22.14,17.672 22.498,18.03 23.321,18.03 23.33,18.02 23.769,18.02 23.779,18.03 23.915,18.03 24.3,18.415 v1(24.3,18.8)
SCL: R9.2 U1.29 U5.1 | length 4.8
  Top Layer w0.16: U1.29 27.9,10.988 27.94,10.948 27.99,10.898 27.99,10.202 27.498,9.71 27.456,9.71 27.451,9.705 27.436,9.705 27.413,9.705 27.355,9.647 27.33,9.647 27.22,9.537 27.22,8.738 27.583,8.375 27.625,8.375 28.35,9.1 R9.2@28.35,9.108
SDA: R8.1 U1.28 U5.6 | length 6.1
  Top Layer w0.16: U5.6 26.825,8.375 ; U1.28 27.4,11.049 27.629,10.82 27.68,10.77 27.68,10.33 27.369,10.02 27.328,10.02 27.323,10.015 27.308,10.015 27.285,10.015 27.227,9.957 27.202,9.957 26.91,9.665 26.91,9.66 26.9,9.65 26.9,8.45 26.825,8.375 ; R8.1 28.265,8.015 27.185,8.015 26.825,8.375
STBY/R\E\S\E\T\: U1.7 U2.6 | length 26.2
  Top Layer w0.16: v1(14.381,6.925) 17.425,6.925 18.2,7.7 18.2,17.63 18.47,17.9 21.2,17.9 21.3,18 v1(21.2,18) ; U1.7 26.9,19.37 26.97,19.3 v1(27,19.3)
  Bottom Layer w0.16: v1(14.381,6.925) 14.526,6.78 U2.6 ; v1(21.2,18) 21.3,18 22.21,18.91 23.16,18.91 23.63,19.38 26.92,19.38 v1(27,19.3) v1@27,19.39
TX: J18.0 U1.33 U7.4 | length 39.5
  Top Layer w0.15: U1.33 30.096,11.771 31.544,11.771 v2(31.591,11.818)
  Top Layer w0.16: U7.4 6.12,12.4 7.4,13.68 7.4,15.35 8.5,16.45 v2(8.5,16.8)
  Bottom Layer w0.15: 28.328,12.29 29.751,12.29 30.266,11.775 30.817,11.775 30.86,11.818 v2(31.591,11.818) 31.618,11.845 34.07,11.845 34.08,11.835 34.721,11.835 35.233,11.324 35.24,11.324
  Bottom Layer w0.16: v2(8.5,16.8) 8.49,16.79 8.49,16.54 22.02,16.54 22.42,16.94 23.448,16.94 24.479,15.909 24.479,13.608 25.796,12.29 28.328,12.29 ; 35.24,11.324 35.24,10.979 35.9,10.319 35.981,10.4 v1(36,10.4)
VIN: C1.1 C4.2 C18.2 C19.2 C20.2 C21.2 D1.1 J6.2 R2.2 U2.4 U2.5 U2.15 U2.16 U2.22 U2.23 U2.33 U2.34 U3.4 U3.5 | length 80.2
  Top Layer w0.15: 34.275,10.175 33.945,9.845 33.945,8.213 34.824,7.334
  Top Layer w0.16: U3.5 U3.4 33.833,5 34.824,5.991 34.824,7.334 ; R2.2 33.56,18.1 34.85,16.81 34.85,14.884 34.725,14.759 34.725,13.987 34.725,13.897 34.85,13.772 34.85,11.328 34.95,11.228 34.95,10.85 34.275,10.175
  Top Layer w0.2: v2@31.3,3.92 v2(31.3,4.1) U3.5 31.3,6.154 C4.2
  Top Layer w0.3: D1.1@8.15,2.5 v2(8.15,3.531)
  Top Layer w0.5: 11.631,16.1 11.7,16.1
  Top Layer w0.8: 11.7,16.1 v3(16.2,20.6)
  Top Layer w1: v3(8.9,7.9) 8.9,13.3 11.7,16.1 ; v3(10.2,17.531) 11.631,16.1 ; J6.2 15.5,4.4 C18.2@16.088,4.4
  Bottom Layer w0.16: J6.2 16.234,1.466 17.522,1.466 17.673,1.315 18.407,1.315 18.792,1.7 29.1,1.7 30.75,3.35 30.75,3.428 30.8,3.478 30.8,3.7 31.2,4.1 v2(31.3,4.1)
  Bottom Layer w0.3: U2.16 8,5.705 C1.1 8,3.681 v2(8.15,3.531) ; U2.33 16.2,19.581
  Bottom Layer w0.4: U2.16 8.351,5.731
  Bottom Layer w0.5: 8.351,5.731 8.351,7.051 8.9,7.6 v3(8.9,7.9) ; 9,19.6 9,18.731 v3(10.2,17.531)
  Bottom Layer w1: v3(8.9,7.9) 14.801,7.9 15.5,7.201 J6.2 ; 16.2,19.581 v3(16.2,20.6)
XMAVCC: C16.1 L6.1 U1.39 | length 2.6
  Top Layer w0.2: U1.39 31.6,15 31.95,14.65 C16.1 33.158,14.65 L6.1
XMVCC1: C8.1 C9.1 C17.1 L3.1 U1.9 U1.19 U1.31 | length 34.8
  Top Layer w0.15: v2(29.1,10.6) 29.1,10.508 29.2,10.407 29.2,10.1 C17.1
  Top Layer w0.16: v1(21.148,15.63) 21.742,16.224 21.742,18.307 21.263,18.787 20.194,18.787 19.5,19.481 19.5,20.906 19.482,20.923 19.482,21.363 19.5,21.38 19.5,22 20.3,22.8 20.325,22.8 20.33,22.805 20.97,22.805 20.975,22.8 21.225,22.8 21.23,22.805 21.87,22.805 21.875,22.8 22.053,22.8 24.383,20.47 24.93,20.47 C9.1 ; v1(21.7,12.288) 21.7,11.2 21.93,10.97 22.868,10.97 23.048,11.15 23.25,11.15 v1(23.8,11.7) ; C8.1@22.494,13.9 22.594,14 22.74,14 22.813,13.927 23.587,13.927 23.66,14 U1.19 ; v1@23.642,11.642 v1@23.642,11.694 ; v2@28.9,10.445 28.9,10.55 28.87,10.58 28.87,11.02 28.9,11.05 U1.31
  Top Layer w0.254: v1(21.868,14.032) 21.9,14 21.9,13.939 21.939,13.9 C8.1 C8.1@22.494,13.9 ; C9.1 25.5,19.512 25.9,19.112 U1.9
  Bottom Layer w0.15: v1(23.8,11.7) 24.6,11.7 25.245,11.055 28.59,11.055 29.21,10.435 29.1,10.545 v2(29.1,10.6)
  Bottom Layer w0.16: v1(21.148,15.63) 21.648,15.13 v1@21.648,14.191 ; v1(21.7,12.288) 21.868,12.456 v1(21.868,14.032) ; v1@23.7,11.7 v1(23.8,11.7)
pads on no net: U1.25 U1.36 U1.37 U1.42 U1.43 U2.11 U5.3 U7.1 U7.3 U7.5 U7.6 U7.7 U7.8 U7.13 U7.14 U7.15 U7.16

## Polygon pours and split planes (outlines as drawn)
GND on Top Layer "Top Layer-GND" (solid, remove dead copper, pour order 6): 12,0 2.53,0 cw(c2.53,2.54) -0.01,2.54 -0.01,21.46 cw(c2.53,21.46) 2.53,24 38.46,24 cw(c38.46,21.46) 41,21.46 41,2.54 cw(c38.46,2.54) 38.46,0
GND on Bottom Layer "Bot-GND" (solid, remove dead copper, pour order 8): 12,0 2.53,0 cw(c2.53,2.54) -0.01,2.54 -0.01,21.46 cw(c2.53,21.46) 2.53,24 38.46,24 cw(c38.46,21.46) 41,21.46 41,2.54 cw(c38.46,2.54) 38.46,0

## Silkscreen, mask and mechanical layers (free items; w line width, h text height)
Top Overlay:
  lines w0.15: 29.645,7.9 29.345,8.2 ; 35.4,8.2 29.3,8.2 29.345,8.2 ; 29.345,8.2 29.645,8.5 29.345,8.2 ; 29.345,8.2 29.345,8.2
  text "2014" at 24,19.3 h1.2 r90
  text "2B" at 1.4,16.8 h1.4
  text "." at 39.8,15.69 h1.4
  text "." at 40,9.1 h1.4
  text "A" at 39.878,7.611 h1
  text "1B" at 1.4,7.2 h1.4
  text "+" at 12.8,2.384 h3
  text "JK" at 19.5,0.9 h1.8

## Text inside footprints (layer, text, board x,y; h text height)
U7: Top Overlay "HM-05" at 9.364,14.087 h1.52; Top Overlay "HM-06" at 9.364,11.039 h1.52; Top Overlay "HM-07" at 9.364,8.042 h1.52; Top Overlay "HM-11" at 9.313,5.781 h1.52